# Altium PCB PCB1.PcbDoc
Units mil, origin at the board's own origin, x right, y up, seen from the top; angles counter-clockwise.
Board outline 3545 x 2770 mil, 2 copper layers (Top Layer, Bottom Layer), stack 64.567 mil thick; 22 components, 40 nets, 103 pads, 3 vias.
Unrouted connection lines stored in the file: 2.
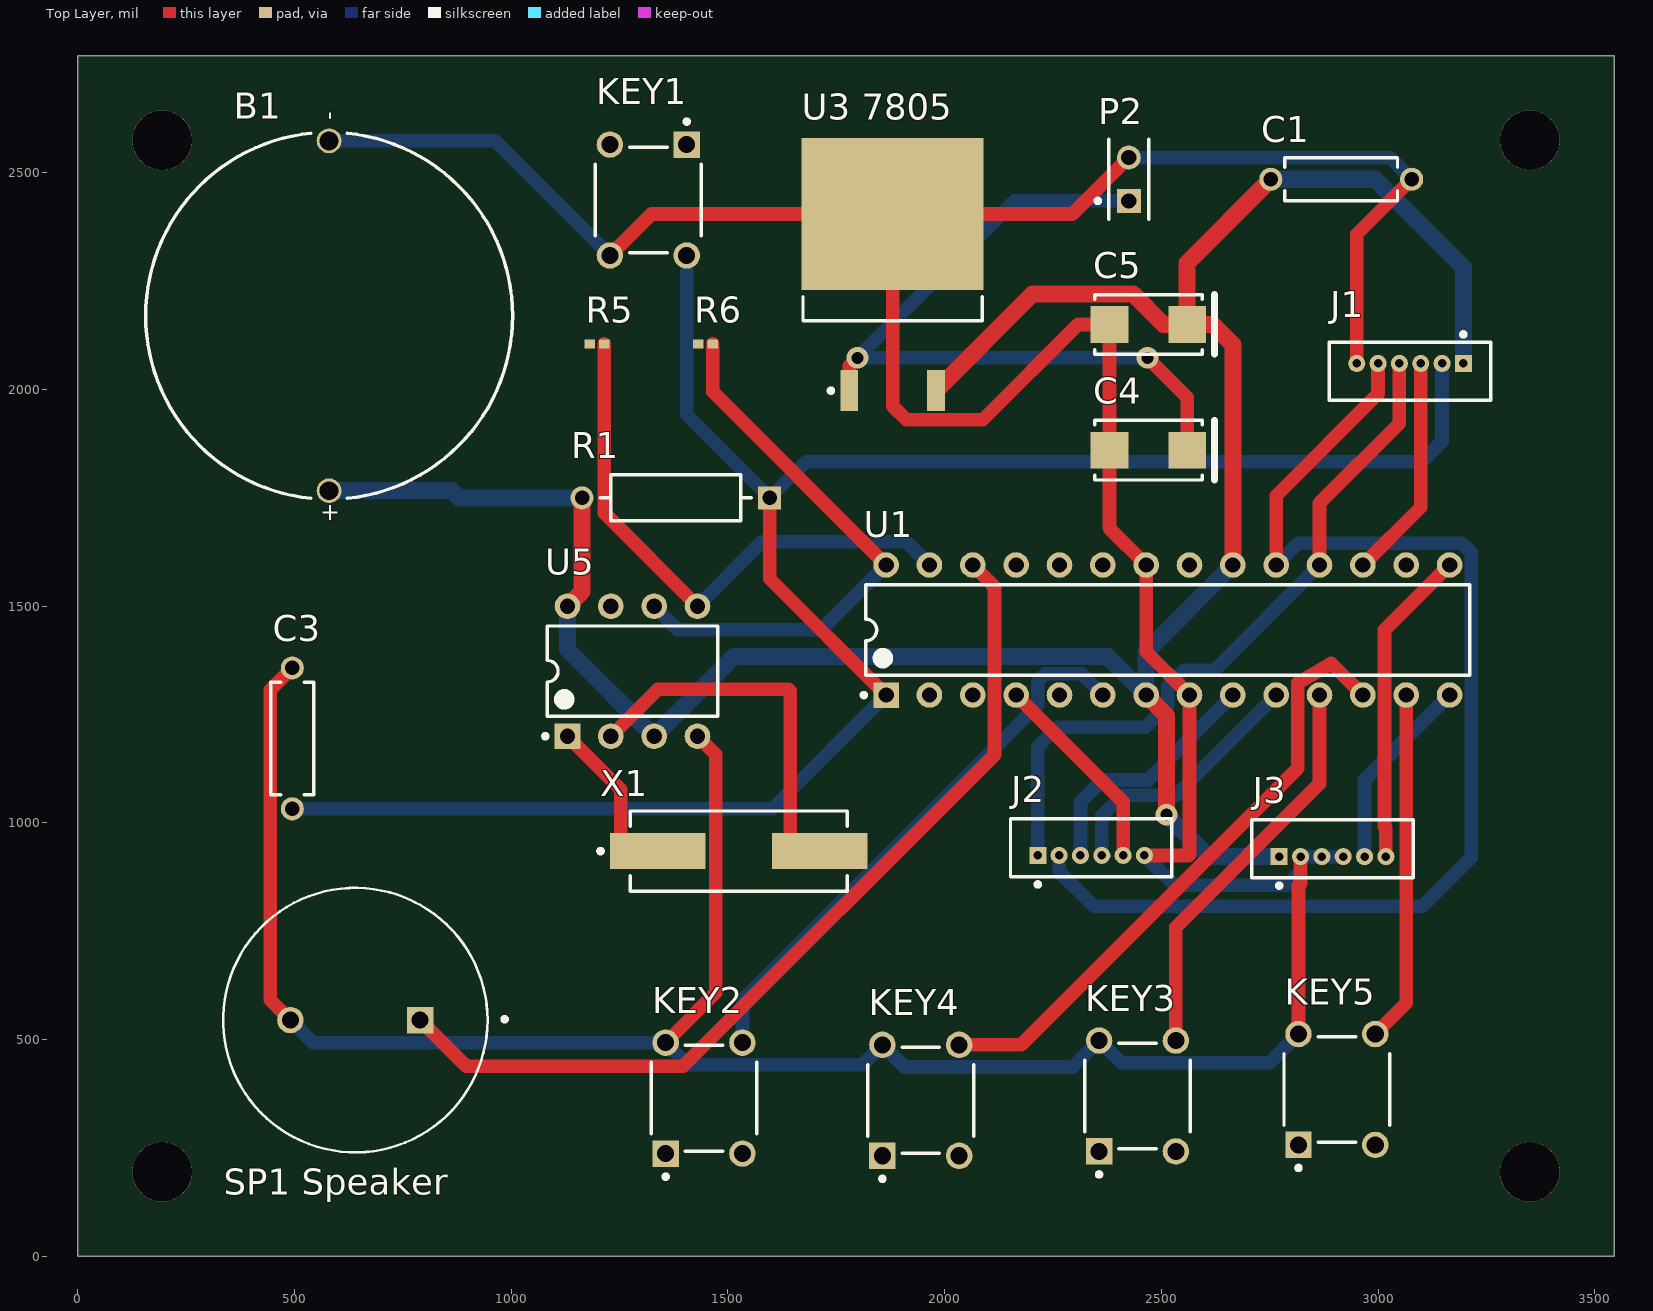
[diagram p0: Top Layer view]
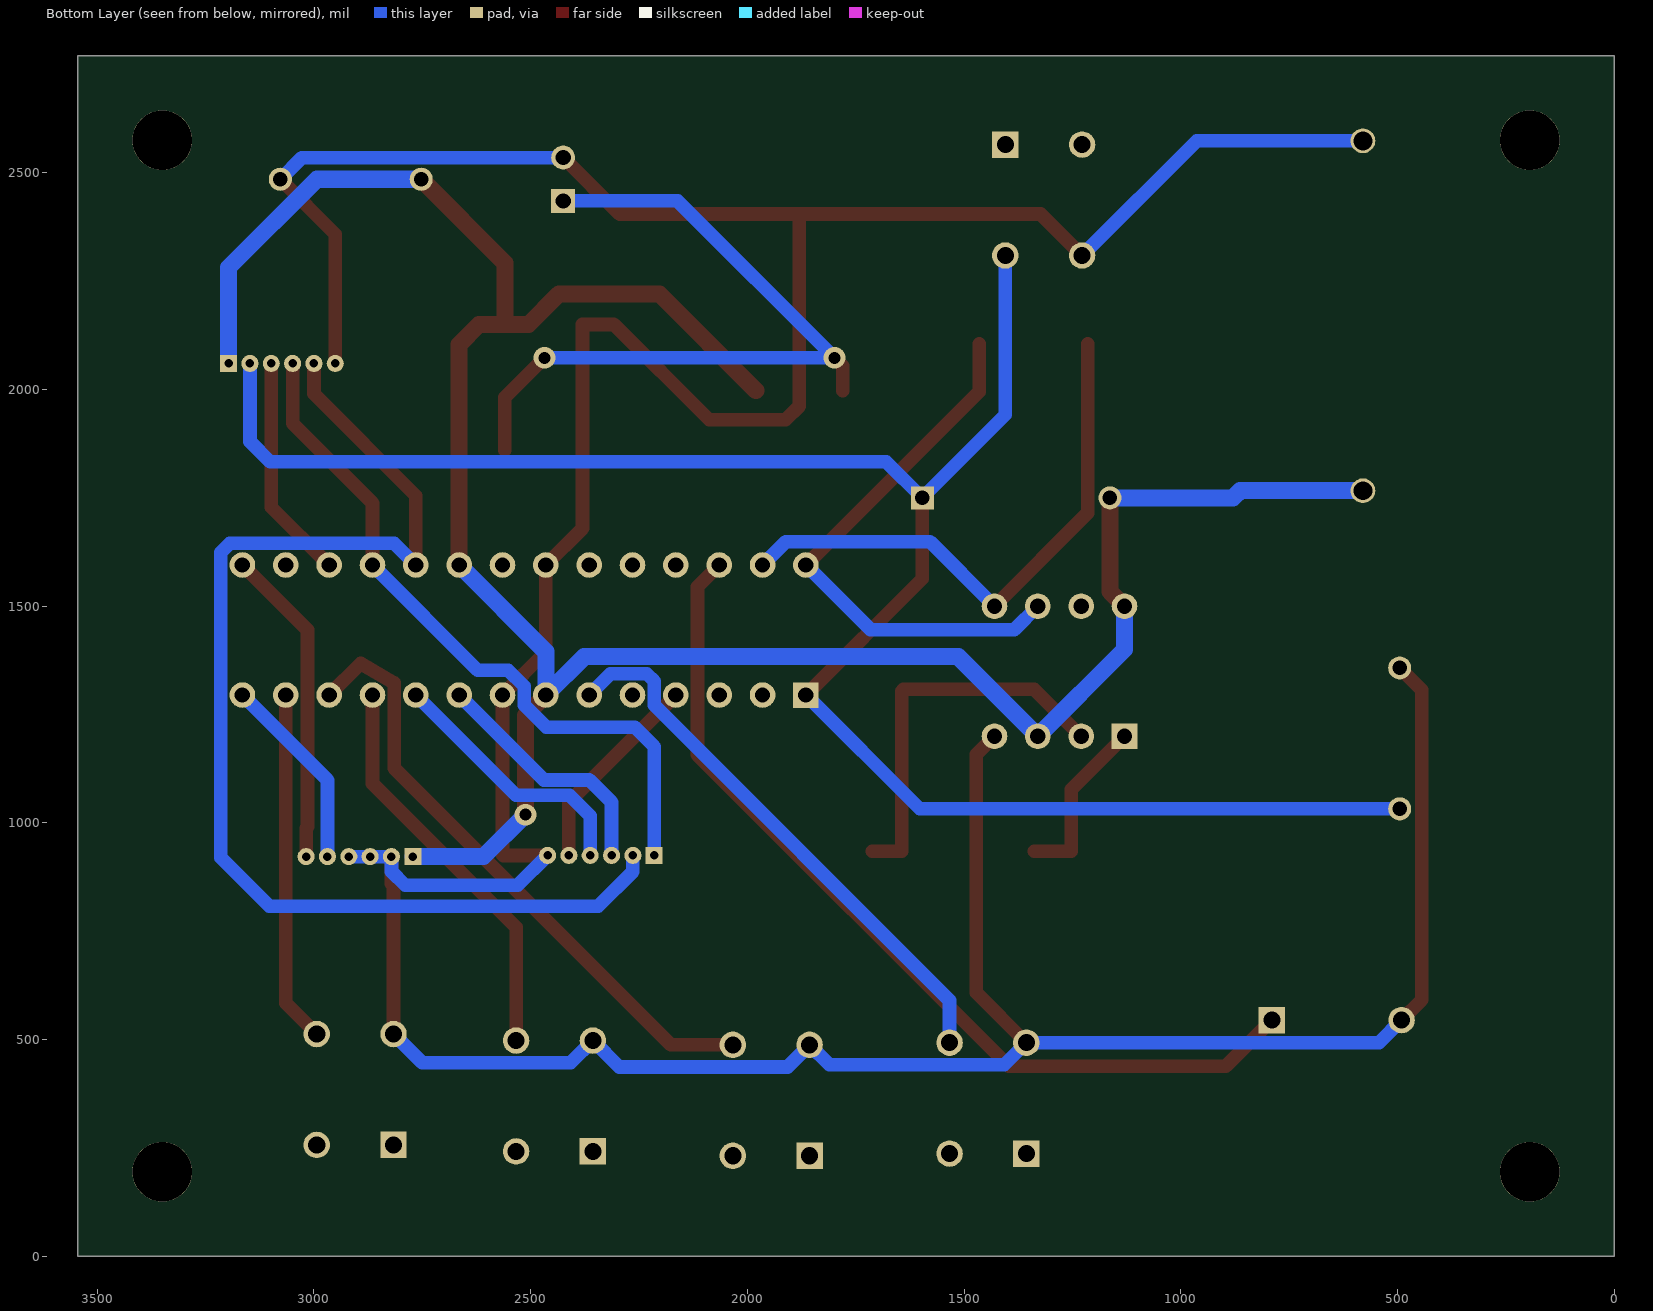
[diagram p1: Bottom Layer view, seen from below]
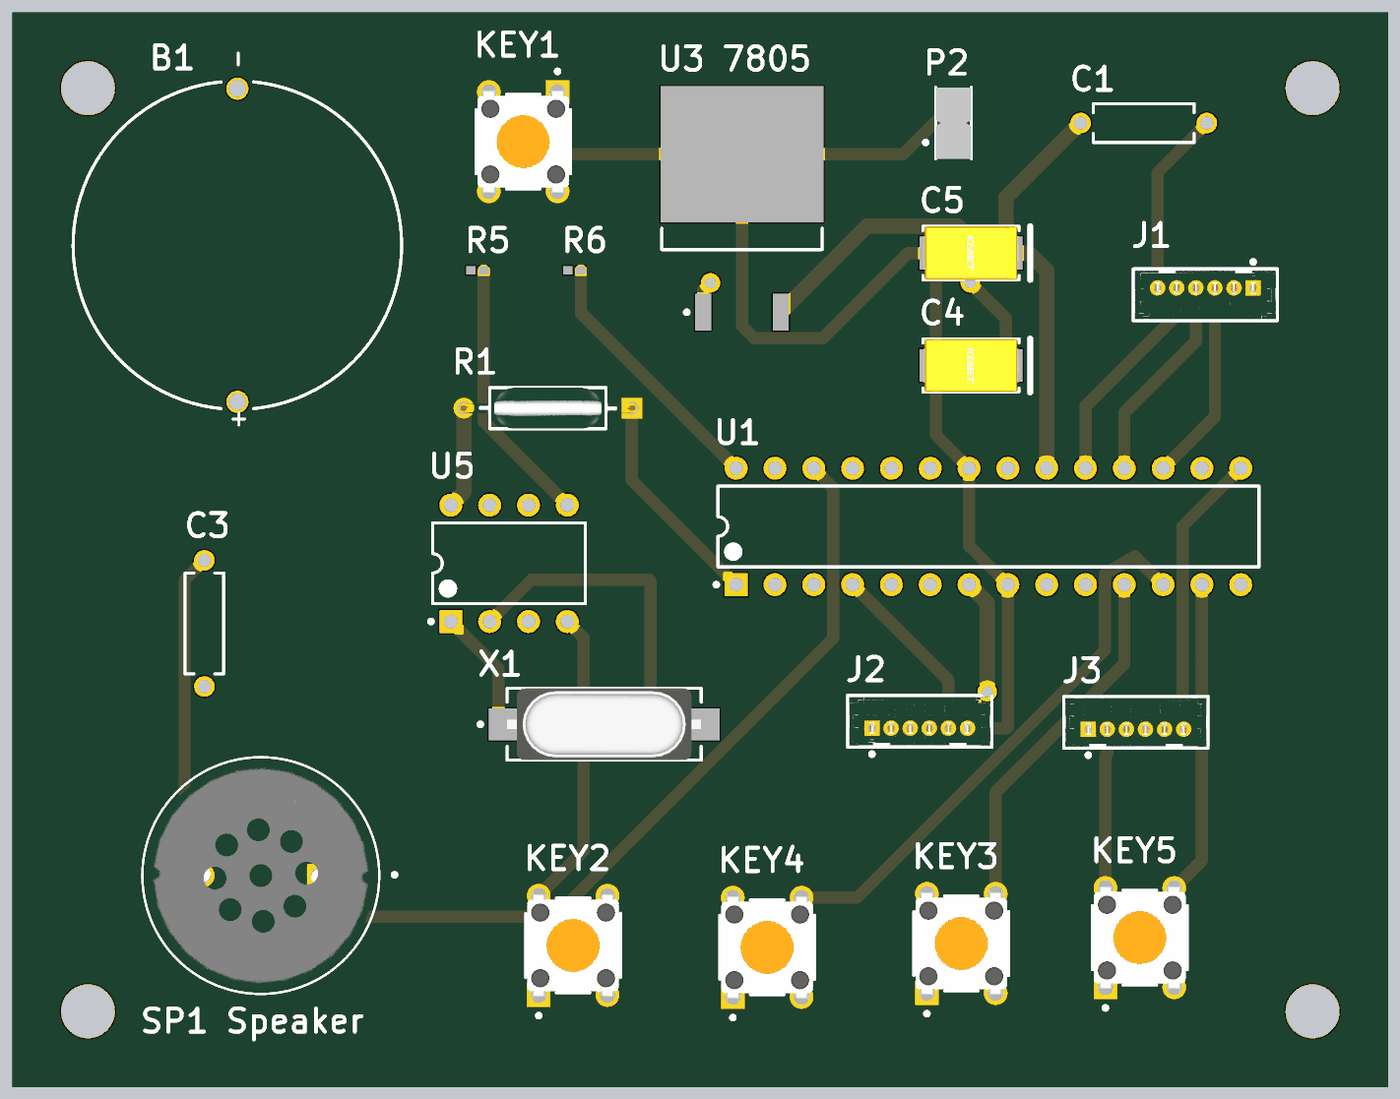
[diagram p2: 3D render of the assembled board from above, using the file's embedded part models]

## Layer stack, top to bottom
Top Solder: solder mask 0.3937, Solder Resist, Dk 3.5
Top Layer: signal copper 2.7559
Dielectric 1: dielectric 59.0551, FR-4, Dk 4.8
Bottom Layer: signal copper 2.7559
Bottom Solder: solder mask 0.3937, Solder Resist, Dk 3.5

## Board outline
0,0 3545,0 3545,2770 0,2770

## Design rules (kind name [scope] priority, off if disabled: settings)
Clearance [All] p1: gap=3.94 ignorepadtopadclearanceinfootprint=FALSE
PolygonConnect [All] p1: connectstyle=Relief reliefconductorwidth=10 reliefentries=4 polygonreliefangle="90 Angle" airgapwidth=10
RoutingVias [All] p1: holewidth=28 width=50 viastyle="Through Hole" minholewidth=28 minwidth=50 maxholewidth=28 maxwidth=50
SolderMaskExpansion [All] p1: expansion=4 istentingtop=FALSE
Width Width_1 [InNet('+5')] p1: maxlimit=40 minlimit=10 preferedwidth=39.37 minimp=50.000000 maximp=50.000000 favimp=50.000000
Width [All] p2: maxlimit=32 minlimit=10 preferedwidth=31.5 minimp=50.000000 maximp=50.000000 favimp=50.000000
30 further rules are at their usual default settings.

## Components (designator, comment, footprint, x,y, rotation, side; value= is the part's Value field where it differs from the comment)
B1 "CR-2032/HFN" PANA-CR-2032HFN 580,2170 r90 top
C1 "MD015E104MAB" AVX-MD01 2915,2485 r180 top
C3 "MD015E104MAB" AVX-MD01 495,1195 r270 top
C4 "T491C106K016AT" KEMT-T491-C_L 2470,1860 r180 top
C5 "T491C106K016AT" KEMT-T491-C_L 2470,2150 r180 top
J1 "530470610" FP-530470610-MFG 3073.82,2042.28 r0 top
J2 "530470610" FP-530470610-MFG 2338.03,942.72 r180 top
J3 "530470610" FP-530470610-MFG 2895,940 r180 top
KEY1 "B3F-1005" FP-B3F-1005-MFG 1316.42,2437.05 r90 top
KEY2 "B3F-1005" FP-B3F-1005-MFG 1445,365 r270 top
KEY3 "B3F-1005" FP-B3F-1005-MFG 2445,370 r270 top
KEY4 "B3F-1005" FP-B3F-1005-MFG 1945,360 r270 top
KEY5 "B3F-1005" FP-B3F-1005-MFG 2905,385 r270 top
P2 "5-146280-2" TECO-5-146280-2_V 2425,2485 r90 top
R1 "RNC55H1002FSB14" FP-RNC55-MFG 1380,1750 r180 top value=10kΩ
R5 "RE0402DR-074K7L" RESC1005X37X25NL05T10 1198.27,2105 r180 top
R6 "RE0402DR-074K7L" RESC1005X37X25NL05T10 1448.27,2105 r180 top
U1 "ATmega328P-PU" 28P3 2515,1445 r90 top
"U3 7805" "Volt Reg" D2PAK_N 1880,2265 r90 top
U5 "DS1307+" P8+2 1280,1350 r90 top
X1 "ABLS-8.000MHZ-B4-T" ABRA-ABLS-14.7456MHZ-B2-T_V 1525,935 r0 top
? "SP1 Speaker" FP-CVS-1508-MFG 640.39,545 r180 top value=8Ω

## Footprints (in the part's own frame and the unit in brackets; to place one, negate y for a bottom-side part, rotate by r counter-clockwise, add the part's x,y. Pads: shape width x height; smd on the part's side, far side on the other; paste and mask are expansions set on the pad)
28P3 [mm] "28-Pin Plastic Dual In-Line Package (PDIP)"
  rect 1.5x1.5 hole 0.9: 1(-3.81,16.51)
  round 1.5 hole 0.9: 2(-3.81,13.97) 3(-3.81,11.43) 4(-3.81,8.89) 5(-3.81,6.35) 6(-3.81,3.81) 7(-3.81,1.27) 8(-3.81,-1.27) 9(-3.81,-3.81) 10(-3.81,-6.35) 11(-3.81,-8.89) 12(-3.81,-11.43) 13(-3.81,-13.97) 14(-3.81,-16.51) 15(3.81,-16.51) 16(3.81,-13.97) 17(3.81,-11.43) 18(3.81,-8.89) 19(3.81,-6.35) 20(3.81,-3.81) 21(3.81,-1.27) 22(3.81,1.27) 23(3.81,3.81) 24(3.81,6.35) 25(3.81,8.89) 26(3.81,11.43) 27(3.81,13.97) 28(3.81,16.51)
  silkscreen extent -3.93,-17.7 2.65,17.93, body extent -3.6,-17.65 3.6,17.65, height 4.58
ABRA-ABLS-14.7456MHZ-B2-T_V [mm] "SMD, 2-Leads, Body 11.4x4.7mm"
  rect 5.6x2.1 smd: 1(-4.75,0) 2(4.75,0)
  silkscreen extent -8.22,-2.35 6.35,2.35, body extent -6.35,-2.35 6.35,2.35, height 4.16
AVX-MD01 [mm] "THD, 2-Leads, Body 6.6x2.54mm"
  round 1.35 hole 0.85: 1(-4.127,0) 2(4.127,0)
  silkscreen extent -3.3,-1.27 3.3,1.27, body extent -3.3,-1.27 3.3,1.27, height 4.45
D2PAK_N [mm] "D2-PAK, 4-Leads, Body 8.8x10.4mm, Pitch 2.54mm, Lead Span 15.1mm, IPC Medium Density"
  rect 2.4x1.05 smd: 1(-6.8,2.54) 3(-6.8,-2.54)
  rect 8.9x10.65 smd: 2(3.55,0)
  silkscreen extent -6.92,-5.25 -1.3,5.25, body extent -2.7,-5.28 6.3,5.28, height 4.69
FP-530470610-MFG [mm]
  rect 1x1 hole 0.5 paste-1000 mask+0: 1(3.125,0.45)
  round 1 hole 0.5 paste-1000 mask+0: 2(1.875,0.45) 3(0.625,0.45) 4(-0.625,0.45) 5(-1.875,0.45) 6(-3.125,0.45)
  silkscreen extent -4.72,-1.7 4.72,2.27, body extent -4.82,-1.8 4.82,1.8, height 0.25
FP-B3F-1005-MFG [mm]
  rect 1.55x1.55 hole 1 paste-1000 mask+0: 1(3.25,-2.25)
  round 1.55 hole 1 paste-1000 mask+0: 2(-3.25,-2.25) 3(3.25,2.25) 4(-3.25,2.25)
  silkscreen extent -3.1,-3.1 4.72,3.1, body extent -4.13,-3.2 4.13,3.2, height 0.25
FP-CVS-1508-MFG [mm]
  rect 1.55x1.55 hole 1 paste-1000 mask+0: 1(-3.8,0)
  round 1.55 hole 1 paste-1000 mask+0: 2(3.8,0)
  silkscreen extent -8.88,-7.75 7.75,7.75, body extent -7.85,-7.85 7.85,7.85, height 0.25
FP-RNC55-MFG [mm]
  rect 1.35x1.35 hole 0.85 paste-1000 mask+0: 1(-5.5,0)
  round 1.35 hole 0.85 paste-1000 mask+0: 2(5.5,0)
  silkscreen extent -4.42,-1.34 4.42,1.34, body extent -6.27,-1.45 6.27,1.45, height 0.25
KEMT-T491-C_L [mm] "Molded Capacitor, 2-Leads, Body 6.30x3.50mm, IPC High Density"
  rect 2.2x2.15 smd: 1(-2.275,0) 2(2.275,0)
  silkscreen extent -3.87,-1.75 3.15,1.75, body extent -3.15,-1.75 3.15,1.75, height 2.79
P8+2 [mm] "DIP, 8-Leads, Row Spacing 7.62mm, Pitch 2.54mm, Body 9.4x7mm"
  rect 1.5x1.5 hole 0.9: 1(-3.81,3.81)
  round 1.5 hole 0.9: 2(-3.81,1.27) 3(-3.81,-1.27) 4(-3.81,-3.81) 5(3.81,-3.81) 6(3.81,-1.27) 7(3.81,1.27) 8(3.81,3.81)
  silkscreen extent -3.93,-5 2.65,5.23, body extent -3.6,-4.95 3.6,4.95, height 4.57
PANA-CR-2032HFN [mm] "TH, 2-Leads, Dia 21.5mm"
  round 1.45 hole 1.1: 1(-10.25,0) 2(10.25,0)
  silkscreen extent -10.7,-10.75 10.7,10.75, body extent -10.75,-10.75 10.75,10.75, height 9.9
RESC1005X37X25NL05T10 [mm] "Chip Resistor, 2-Leads, Body 1.00x0.50mm, IPC Medium Density"
  rect 0.6x0.55 smd: 1(-0.425,0) 2(0.425,0)
  body extent -0.53,-0.27 0.53,0.28, height 0.37
TECO-5-146280-2_V [mm] "Connector, 2-Leads, Body 4.67x2.34mm, Pitch 2.54mm"
  rect 1.4x1.4 hole 0.89: 1(-1.27,0)
  round 1.4 hole 0.89: 2(1.27,0)
  silkscreen extent -2.34,-1.17 2.34,1.94, body extent -2.34,-1.17 2.34,1.17, height 5.33

## Part data
B1: library part CMP-2000-05296-1, "Coin Cell Battery, 225 mAh, 0.2 mA, 3 V, -30 to 60 degC, Bulk", Battery Capacity=220mAh, Battery Voltage=3V, Manufacturer=Panasonic, Battery IEC Code=CR2032, Battery NEDA Code=5004LC, Battery Size Code=2032, Battery Technology=LithiumManganeseDioxide, Battery Terminals=PCBPins, Datasheet URL=https://datasheet.ciiva.com/3/aaa4000de87-3072.pdf, Datasheet Version="Rev. 0, 05/2010", External Depth=-, External Diameter=20mm, External Height=3.2mm, External Width=-, Manufacturer URL=http://www.panasonic.com/, Product Range=-, SVHC=1,2-dimethoxyethane,ethyleneglycoldimethylether(EGDME)(15-Jun-2015), Weight=2.9g
C1 C3: library part CMP-2000-06690-1, "Ceramic Capacitor, 0.1 uF, +/- 20%, 50 V, -55 to 125 degC, 2-Pin THD (MD01), Bulk", Capacitance=100nF, Case Size/Dimension=6.6x3.43x2.54mm, Dielectric=Z5U, Manufacturer=AVX, Package Description="2-Pin Through Hole Device, Body 6.6 x 2.54 mm", Package Reference=AVX-MD01, Rated Voltage=50V, Tolerance (%)=±20%, Datasheet URL=http://datasheets.avx.com/dipguard.pdf, Datasheet Version=08/2015, Manufacturer URL=http://www.avx.com/, Mounting Technology=ThroughHole
C4 C5: library part CMP-2000-07197-1, "Tantalum Capacitor, 10 uF, +/- 10%, 16 V, -55 to 125 degC, 2-Pin SMD (T491-C), RoHS, Tape and Reel", Capacitance=330nF, Case Code=C, Case Style=Molded, Manufacturer=Kemet, Operating Temp Range=-55Cto125C, Package / Case=6032-28, Package Description="2-Pin Surface Mount Device, Body 6 x 3.2 mm", Package Reference=T491-C, Tolerance (+ or -)=10%, Voltage=16VDC, Construction=SMTChip, Datasheet URL=http://capacitoredge.kemet.com/capedge2/DataSheet/Datasheet-T491C106K016AT.pdf?pn=T491C106K016AT, Datasheet Version=10/2016, DCL=1.6uA, DF=6%, ESR=1.8ohm, Failure Rate=NotRequired, Insulation=NotRequired, Lead Spacing (nom)=NotRequiredmm, Length W/Weld=NotRequiredmm, Length W/Weld (max)=NotRequiredmm, Manufacturer URL=http://www.kemet.com/, Mounting Style=SurfaceMount, Mounting Technology=SurfaceMount, Packaging=TapeandReel, Polarity=Polar, Product Depth (mm)=3.2mm, Product Diameter (mm)=NotRequiredmm, Product Height (mm)=2.5mm, Product Length (mm)=6mm, Rad Hardened=No, Seal=NotRequired, Seated Plane Height=NotRequiredmm, Wire Form=NotRequired
J1 J2 J3: library part CMP-2000-05476-3, "CONN HEADER VERT 6POS 1.25MM", Current Rating=1A, Manufacturer=Molex, Package=0, Temperature="-40°C to +85°C", Temperature Range High=+85°C, Temperature Range Low=-40°C, Voltage Rating=125V, Automotive=No, Category=Conn, ComponentLink2Description=Datasheet, ComponentLink2URL=https://www.molex.com/webdocs/datasheets/pdf/en-us/0530470610_PCB_HEADERS.pdf, Conn Gender=Male, Conn Orientation=Vertical, Contact Material=Tin, Device Class L1=Connectors, Device Class L2="Headers and Wire Housings", Device Class L3=unset, Digikey Description="CONN HEADER VERT 6POS 1.25MM", Footprint Url=https://www.molex.com/pdm_docs/sd/530470610_sd.pdf, Height=4.4mm, Lead Free=Yes, Manufacturer Part Number=530470610, Mouser Description="Headers & Wire Housings VERTICAL HDR 6P", Number Of Contacts=6, Number Of Rows=1, Octopart=https://octopart.com/53047-0610-molex-276776, Pitch=1.25mm, RoHS=TRUE
KEY1 KEY2 KEY3 KEY4 KEY5: library part CMP-08834-000043-1, "SWITCH TACTILE SPST-NO 0.05A 24V", Actuator Color=Orange, Contact Current Rating=50mA, Contact Resistance=100mR, Max Operating Temperature=70°C, Max Voltage Rating (DC)=24V, Min Operating Temperature=-25°C, Operating Force=2.55N, Package Quantity=1500, Ratings=IP00, Actuator Length=0.9mm, Actuator Type=Standard, Contact Material=Gold, Contact Plating=Silver, Current Rating=50mA, Depth=6mm, Electrical Life=300000Cycles, Height=4.3mm, Illumination Type=Non-Illuminated, Lead Free="Lead Free", Length=6mm, Max Current Rating=50mA, Mechanical Life=100000Cycles, Mount="Through Hole", Number of Poles=1, Orientation=Straight, Packaging=Bag, Series=B3F, Switch Function=Off-Mom, Switch Travel=0.25mm, Termination="PC Pins", Throw Configuration=SPST, Voltage Rating (DC)=24V, Weight=0.25g, Width=6mm
P2: library part CMP-2000-07492-1, "Male Header, Pitch 2.54 mm, 1 x 2 Position, Height 8.21 mm, Tail Length 3.05 mm, -65 to 105 degC, RoHS, Bulk", Case\/Package=100, Colour=Black, Current Rating=3A, Flammability Rating=UL94V-0, High Temperature Housing=Yes, Manufacturer="TE Connectivity", Max Current Rating=5A, Max Operating Temperature=105degC, Min Operating Temperature=-65degC, Package Description="Male Header, Pitch 2.54 mm, 1 x 2 Position, Height 8.21 mm, Tail Length 3.05 mm", Package Quantity=500, Approvals=CSA, Board Standoff=No(Without), Connector Type=Header, Contact Gender=Male, Contact Material=CopperAlloy, Contact Mating Length=0.23inch, Contact Plating=Matte, Contact Protection=No(Without), Contact Shape=Square, Datasheet URL=http://www.te.com/commerce/DocumentDelivery/DDEController?Action=showdoc&DocId=Customer+Drawing%7F146280%7FH1%7Fpdf%7FEnglish%7FENG_CD_146280_H1.pdf%7F5-146280-2, Datasheet Version="Rev. H1, 08/2016", Depth=2.34mm, Gasket=No(Without), High Speed Serial Data Connector=No, Housing Colour=Black, Housing Material=Polymer, Keyed=No, Length=4.67mm, Manufacturer URL=http://www.te.com/, Mating Alignment=No(Without), Mating Connector Lock=No(Without), Mating Post Length=0.23inch, Mount=ThroughHole, Mounting Technology=ThroughHole, Number Of Contacts=2, Number of Positions=2, Number Of Rows=1, Orientation=Straight, Package Reference=5-146280-2, Packaging=Carton, Panel Mount Retention=No(Without), PCB Mount Retention=Without, PCB Mounting Orientation=Vertical, PCB Thickness=0.063inch, Pitch=2.54mm, Radiation Hardening=No, RoHSCompliant=true, Row Spacing=2.54mm, Selectively Loaded=No(Without), Stabilizers=No(Without), Termination=ThroughHole, Termination Post Length=0.12inch
R1: library part CMP-02408-000004-1, "RES 10K OHM 1/8W 1% AXIAL", Manufacturer=Vishay, Package=RNC55, Power Rating=0.125W, Resistance=10kΩ, Temperature="-65°C to +175°C", Temperature Coefficient=50ppm/°C, Temperature Range High=+175°C, Temperature Range Low=-65°C, Tolerance=1%, Voltage Rating=200V, Automotive=No, Category=Res, ComponentLink2Description=Datasheet, ComponentLink2URL=https://www.vishay.com/docs/31025/erc.pdf, Composition="Metal Film", Device Class L1="Passive Components", Device Class L2=Resistors, Device Class L3="Through-Hole Resistors", Digikey Description="RES 10K OHM 1/8W 1% AXIAL", Failure Rate=0.001%, Height=2.69mm, Ipc Land Pattern Name=RESAD1100W85L762D269, Lead Free=No, Manufacturer Part Number=RNC55H1002FSB14, Military Standard=true, Octopart=https://octopart.com/rnc55h1002fs-vishay-40848808, RoHS=FALSE, Series=RNC
R5 R6: library part CMP-2002-01865-1, Manufacturer="Yageo / Phycomp", Resistance=4k7, Part Number=RE0402DR-074K7L
U1: library part CMP-0095-00013-2, "8-bit AVR Microcontroller, 32KB Flash, 1KB EEPROM, 2KB SRAM, 28-pin PDIP, Industrial Grade (-40°C to 85°C)", ComponentLink1Description="Manufacturer URL", ComponentLink1URL=http://www.atmel.com/, ComponentLink2Description="ATmega48A/48PA/88A/88PA/168A/168PA/328/328P Datasheet", ComponentLink2URL=http://www.atmel.com/dyn/resources/prod_documents/8271.pdf, ComponentLink3Description="ATmega48A/48PA/88A/88PA/168A/168PA/328/328P Summary", ComponentLink3URL=http://www.atmel.com/dyn/resources/prod_documents/8271S.pdf, DatasheetVersion="revD, May-2011", PackageDescription="28-lead (0.300\"/7.62mm Wide) Plastic Dual Inline Package (PDIP)", PackageReference=28P3, PackageVersion="revB, Sep-2001", RevisionNote="DatasheetVersion updated. URLs added."
"U3 7805": "Voltage Regulator", LatestRevisionDate=29-May-2009, LatestRevisionNote="IPC-7351 Footprint Added.", PackageDescription="3-Pin Transistor Outline Package 2.54 mm Pitch, 15.1 mm Lead Span", PackageReference=D2PAK, Published=24-Mar-1999, Publisher="Altium Limited"
U5: library part CMP-0254-00152-1, "64 x 8, Serial, I2C Real-Time Clock, 5.0V, 8-Pin PDIP, 0 to 70 degC, Pb-Free", Code_JEDEC=MS-001-AB, ComponentLink1Description="Manufacturer URL", ComponentLink1URL=http://www.maxim-ic.com, ComponentLink2Description=Datasheet, ComponentLink2URL=http://datasheets.maxim-ic.com/en/ds/DS1307.pdf, ComponentLink3Description="Package Specification", ComponentLink3URL=http://pdfserv.maxim-ic.com/package_dwgs/21-0043.PDF, DatasheetVersion=10-Feb-2008, PackageDescription="8-Pin Plastic Dual-In-Line, Narrow (0.3in), Pitch 2.54 mm, PDIP(N), Pb-Free", PackageReference=P8+2, PackageVersion="revE, 2011"
X1: library part CMP-2000-05726-1, "Low Profile Crystal, 8.0 MHz, +/- 30 ppm, -20 to 70 degC, 2-Pin SMD, RoHS, Tape and Reel", Case Height=4.2mm, Case Length=11.4mm, Case Width=4.7mm, Frequency=8MHz, Frequency Stability=50PPM, Load Capacitance=18pF, Manufacturer=ABRACON, Operating Temperature Range=-20Cto+70C, Package / Case=HC-49/US, Package Description="2-Pin Surface Mount Device, Body 11.4 x 4.7 mm", Package Reference=ABLS-14.7456MHZ-B2-T, Tolerance=30PPM, Brand=ABRACON, Datasheet URL=http://www.abracon.com/Resonators/abls.pdf, Datasheet Version=04/2011, Dimensions=4.7mmWx11.4mmLx4.2mmH, ESR=80Ohms, Factory Pack Quantity=1000, Manufacturer URL=http://www.abracon.com/, Mounting Style=SMD/SMT, Mounting Technology=SurfaceMount, Package URL=http://www.abracon.com/Support/PackageDrawing/Resonators/ABLS-2D.pdf, Packaging=Reel, Product Category=Crystals, RoHS=Details, Series=ABLS, Termination Style=SMD/SMT, Type=LowProfileMicroprocessorCrystal
?: library part CMP-14846-000001-1, "SPEAKER 8OHM 300MW TOP PORT 87DB", Frequency=1700Hz, Manufacturer="CUI Inc", Manufacturer Part Number=CVS-1508, Resistance=8Ω, Temperature="-20°C to +55°C", Temperature Range High=+55°C, Temperature Range Low=-20°C, Automotive=No, Category=Speak, ComponentLink2Description=Datasheet, ComponentLink2URL=https://www.cui.com/product/resource/cvs-1508.pdf, Device Class L1=Electromechanical, Device Class L2="Audio Products", Device Class L3=Speakers, Digikey Description="SPEAKER 8OHM 300MW TOP PORT 87DB", Height=8mm, Lead Free=Yes, Mouser Description="Speakers & Transducers Speakers", Octopart=https://octopart.com/cvs-1508-cui-21325683, Package=CVS-1508, RoHS=TRUE

## Free pads (board coordinates)
  round 137.8 hole 137.79: ""(195,195) ""(195,2575) ""(3350,195) ""(3350,2575)

## Via types
v1: diameter 50, hole 28, Top Layer to Bottom Layer, 3 vias

## Nets (pads, with @x,y where several pads share a name; then routed paths per layer and width w, separated by ;. In a path a pad name is that pad's centre, name@x,y a point inside that pad or via, vN(x,y) a via of type N, cw(c..) or ccw(c..) an arc to the next point about the centre after c; other vN are vias at no path point)
+5: "U3 7805.3" B1.1 C1.2 C5.1 J1.1 J3.1 R1.2 R5.2 R6.2 U1.7 U1.20 U5.3 U5.8 | length 5962.2
  Top Layer w39.37: U5.8 1163.46,1533.46 R1.2 ; 1980,1997.28 2202.72,2220 2435,2220 2505,2150 C5.1 ; U1.7 2512,1248 v1(2512,1019) ; U1.20 2665,2104 2619,2150 C5.1 ; C1.2 2559.57,2292.07 C5.1
  Bottom Layer w39.37: B1.1 863,1766.46 879.46,1750 R1.2 ; U5.8 1130,1400 U5.3 1513.58,1383.58 2376.42,1383.58 U1.7 2465,1395 U1.20 ; v1(2512,1019) 2608.72,922.28 J3.1 ; C1.2 2993,2485 3196.85,2281.15 J1.1
GND: "U3 7805.2" ?.2 B1.2 C1.1 C3.1 C4.2 C5.2 J1.6 J2.6 J3.2 J3.3 J3.4 KEY1.4 KEY2.2 KEY3.2 KEY4.2 KEY5.2 P2.2 U1.8 U1.22 U5.4 | length 10704
  Top Layer w31.5: ?.2 444,591.79 444,1306.5 C3.1 ; KEY1.4 1323.5,2404.76 1880,2404.76 ; KEY2.2 1472,608.53 1472,1158 U5.4 ; P2.2 2294.76,2404.76 1880,2404.76 ; J2.6 2563,925 2565,927 U1.8 2465,1395 U1.22 2380.43,1679.57 C4.2 C5.2 2308,2150 2088,1930 1912,1930 1880,1962 1880,2404.76 ; KEY5.2 2816.42,855.09 2821.18,859.86 J3.2 ; J1.6 2950.79,2358.29 C1.1
  Bottom Layer w31.5: ?.2 542.84,492.95 KEY2.2 1407.37,442 1810.47,442 KEY4.2 1907.37,437 2295.47,437 KEY3.2 2407.37,447 2750.47,447 KEY5.2 ; B1.2 963.38,2573.54 KEY1.4 ; P2.2 3027.5,2535 C1.1 ; J2.6 2530.06,856 2789.18,856 2821.18,888 J3.2 J3.3 J3.4
Net_1: ?.1 U1.26 | length 2125
  Top Layer w31.5: ?.1 896,439 1397,439 2115,1157 2115,1545 U1.26
NetC3_2: C3.2 J1.2 KEY1.2 R1.1 U1.1 | length 4468.3
  Top Layer w31.5: R1.1 1596.54,1563.46 U1.1
  Bottom Layer w31.5: C3.2 1602.5,1032.5 U1.1 ; KEY1.2 1405,1941.54 R1.1 1679.54,1833 3100.64,1833 3147.64,1880 J1.2
NetJ1_3: J1.3 U1.17 | length 520.3
  Top Layer w31.5: U1.17 3098.43,1728.43 J1.3
NetJ1_4: J1.4 J2.1 U1.18 | length 1641.2
  Top Layer w31.5: U1.18 2865,1737.79 3049.21,1922 J1.4
  Bottom Layer w31.5: J2.1 2215,1176 2260,1221 2464,1221 2515,1272 2515,1315.32 2552,1352.32 2622.32,1352.32 U1.18
NetJ1_5: J1.5 J2.2 U1.19 | length 2813.1
  Top Layer w31.5: U1.19 2765,1755 3000,1990 J1.5
  Bottom Layer w31.5: J2.2 2264.21,888 2344.21,808 3103,808 3215,920 3215,1624 3194,1645 2815,1645 U1.19
NetJ2_3: J2.3 U1.9 | length 576.9
  Bottom Layer w31.5: J2.3 2313.43,1048 2364.55,1099.12 2469.12,1099.12 U1.9
NetJ2_4: J2.4 U1.10 | length 608.9
  Bottom Layer w31.5: J2.4 2362.64,1016 2410.32,1063.69 2533.69,1063.69 U1.10
NetJ2_5: J2.5 U1.4 | length 472.2
  Top Layer w31.5: U1.4 2411.85,1048.15 J2.5
NetJ3_5: J3.5 U1.14 | length 454
  Bottom Layer w31.5: J3.5 2968.82,1098.82 U1.14
NetJ3_6: J3.6 U1.15 | length 736.1
  Top Layer w31.5: J3.6 3018.03,988 3015,991.03 3015,1445 U1.15
NetKEY1_1: KEY1.1
NetKEY1_3: KEY1.3
NetKEY2_1: KEY2.1
NetKEY2_3: KEY2.3
NetKEY2_4: KEY2.4 U1.6 | length 1293.9
  Bottom Layer w31.5: KEY2.4 1533.58,590.58 2215,1272 2215,1327.21 2232,1344.21 2315.79,1344.21 U1.6
NetKEY3_1: KEY3.1
NetKEY3_3: KEY3.3
NetKEY3_4: KEY3.4 U1.11 | length 934.3
  Top Layer w31.5: KEY3.4 2533.58,759.39 2865,1090.81 U1.11
NetKEY4_1: KEY4.1
NetKEY4_3: KEY4.3
NetKEY4_4: KEY4.4 U1.12 | length 1434.8
  Top Layer w31.5: KEY4.4 2176.39,487.95 2815,1126.57 2815,1323 2892,1368 U1.12
NetKEY5_1: KEY5.1
NetKEY5_3: KEY5.3
NetKEY5_4: KEY5.4 U1.13 | length 811.6
  Top Layer w31.5: KEY5.4 3065,584.37 U1.13
NetR5_1: R5.1 U1.27 U5.5 | length 1313.1
  Top Layer w31.5: R5.1 1215,1715 U5.5
  Bottom Layer w31.5: U5.5 1579,1649 1911,1649 U1.27
NetR6_1: R6.1 U1.28 U5.6 | length 1294.8
  Top Layer w31.5: R6.1 1465,1995 U1.28
  Bottom Layer w31.5: U5.6 1384,1446 1716,1446 U1.28
NetU1_2: U1.2
NetU1_3: U1.3
NetU1_5: U1.5
NetU1_16: U1.16
NetU1_21: U1.21
NetU1_23: U1.23
NetU1_24: U1.24
NetU1_25: U1.25
NetU5_1: U5.1 X1.1 | length 400.9
  Top Layer w31.5: U5.1 1253,1077 1253,935 X1.1
NetU5_2: U5.2 X1.2 | length 897.4
  Top Layer w31.5: U5.2 1338,1308 1640,1308 1644,1304 1644,935 X1.2
NetU5_7: U5.7
VCC: "U3 7805.1" C4.1 P2.1 | length 1779.5
  Top Layer w31.5: 1780,1997.28 1780,2054 v1(1799,2073) ; v1(2468,2073) 2559.57,1981.43 C4.1
  Bottom Layer w31.5: P2.1 2161,2435 v1(1799,2073) v1(2468,2073)

## Dimensions
0,2770 to 75,-10 on Top Layer
0,0 to 3545,-10 on Top Layer

## Text inside footprints (layer, text, board x,y; h text height)
B1: Top Overlay "-" at 597.72,2620.91 h40 r90; Top Overlay "+" at 599.68,1692.44 h40 r90; Mechanical 5 "-" at 597.72,2620.91 h40 r90; Mechanical 5 "+" at 599.68,1692.44 h40 r90